# Altium PCB 考勤机指纹密码部分PCB图.PcbDoc
Units mm, origin at the board's own origin, x right, y up, seen from the top; angles counter-clockwise.
Board outline 87.68 x 99.29 mm, 2 copper layers (Top Layer, Bottom Layer); 45 components, 50 nets, 203 pads, 2 vias.
Unrouted connection lines stored in the file: 12.
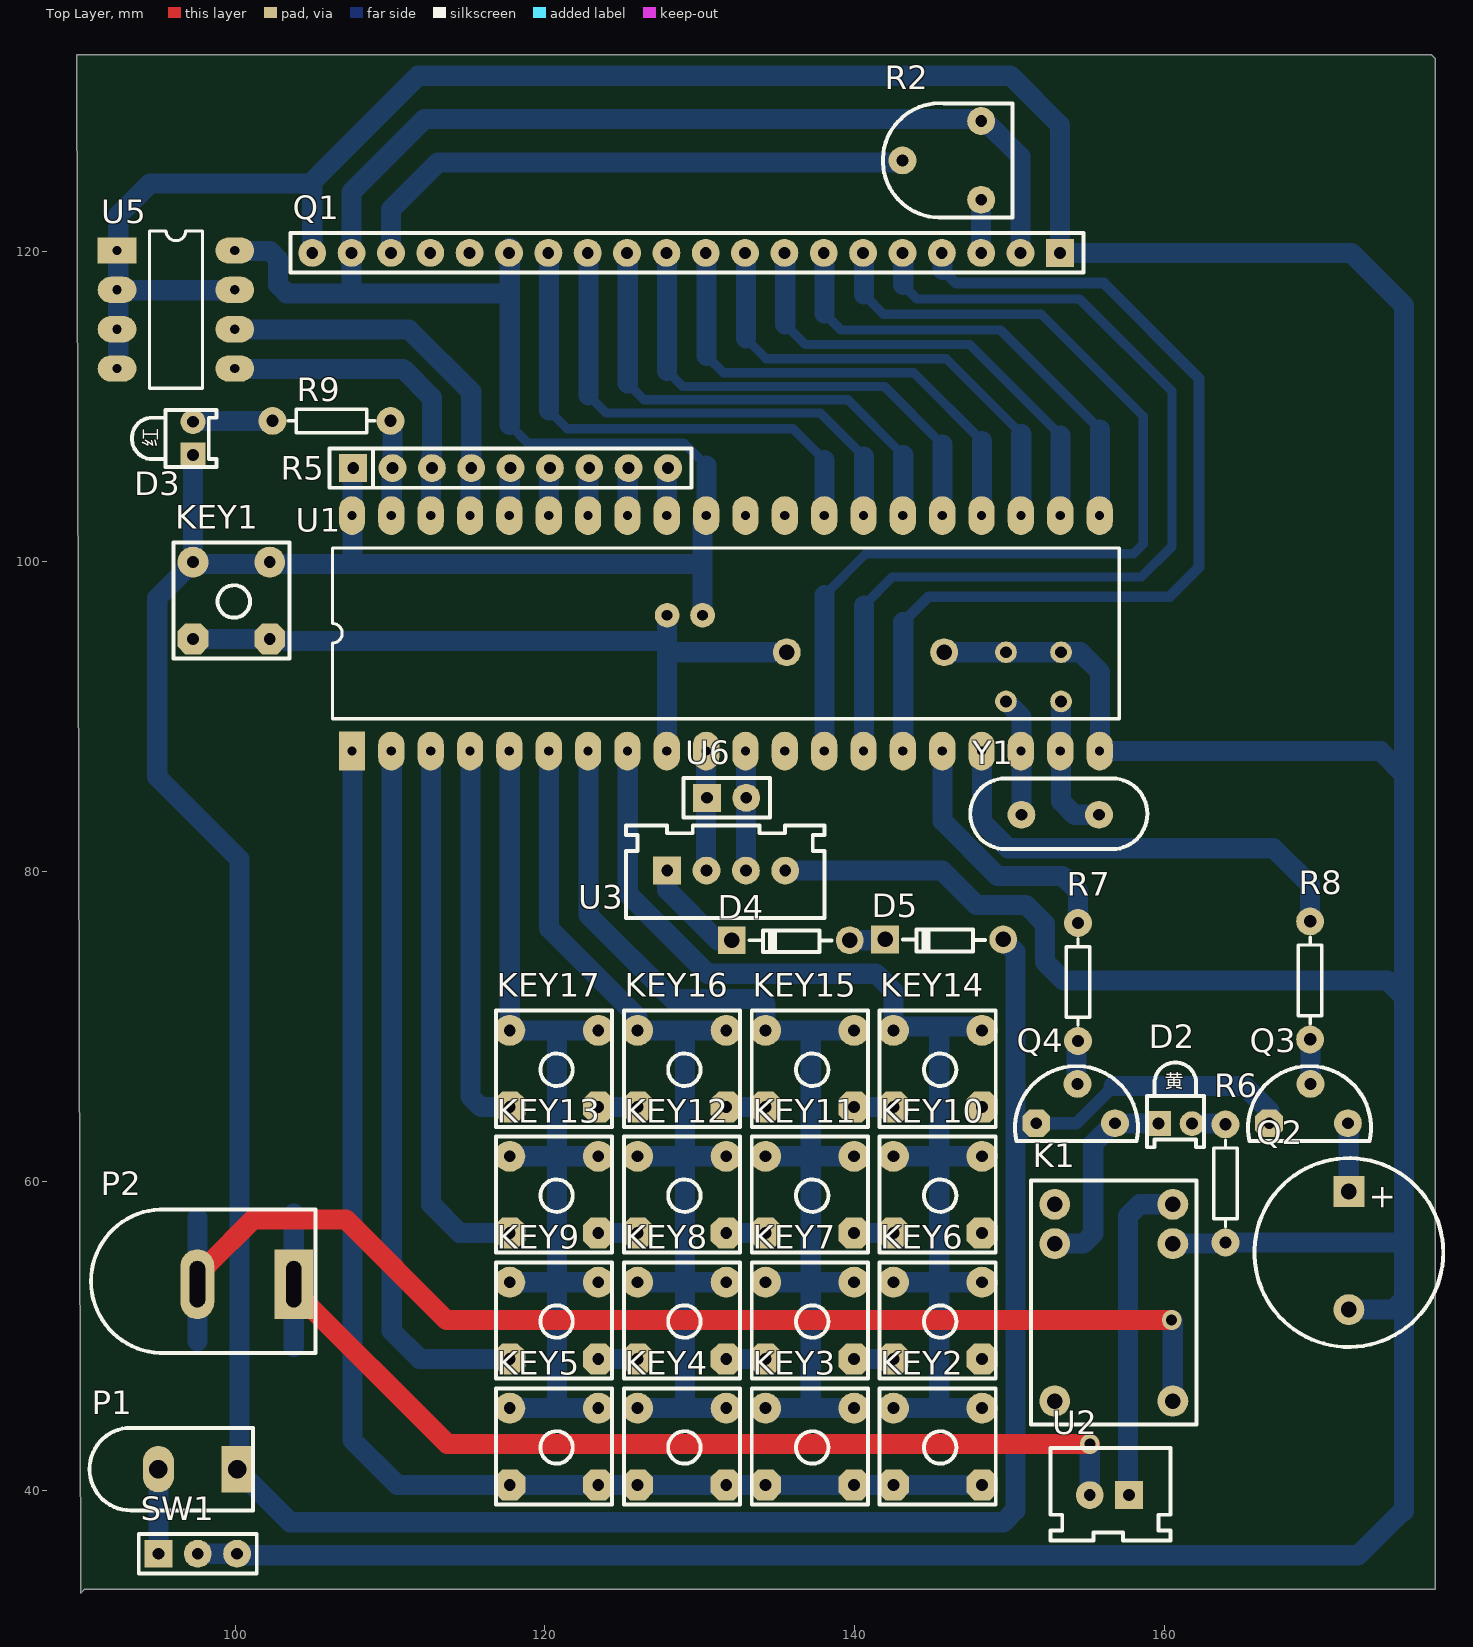
[diagram p0: Top Layer view]
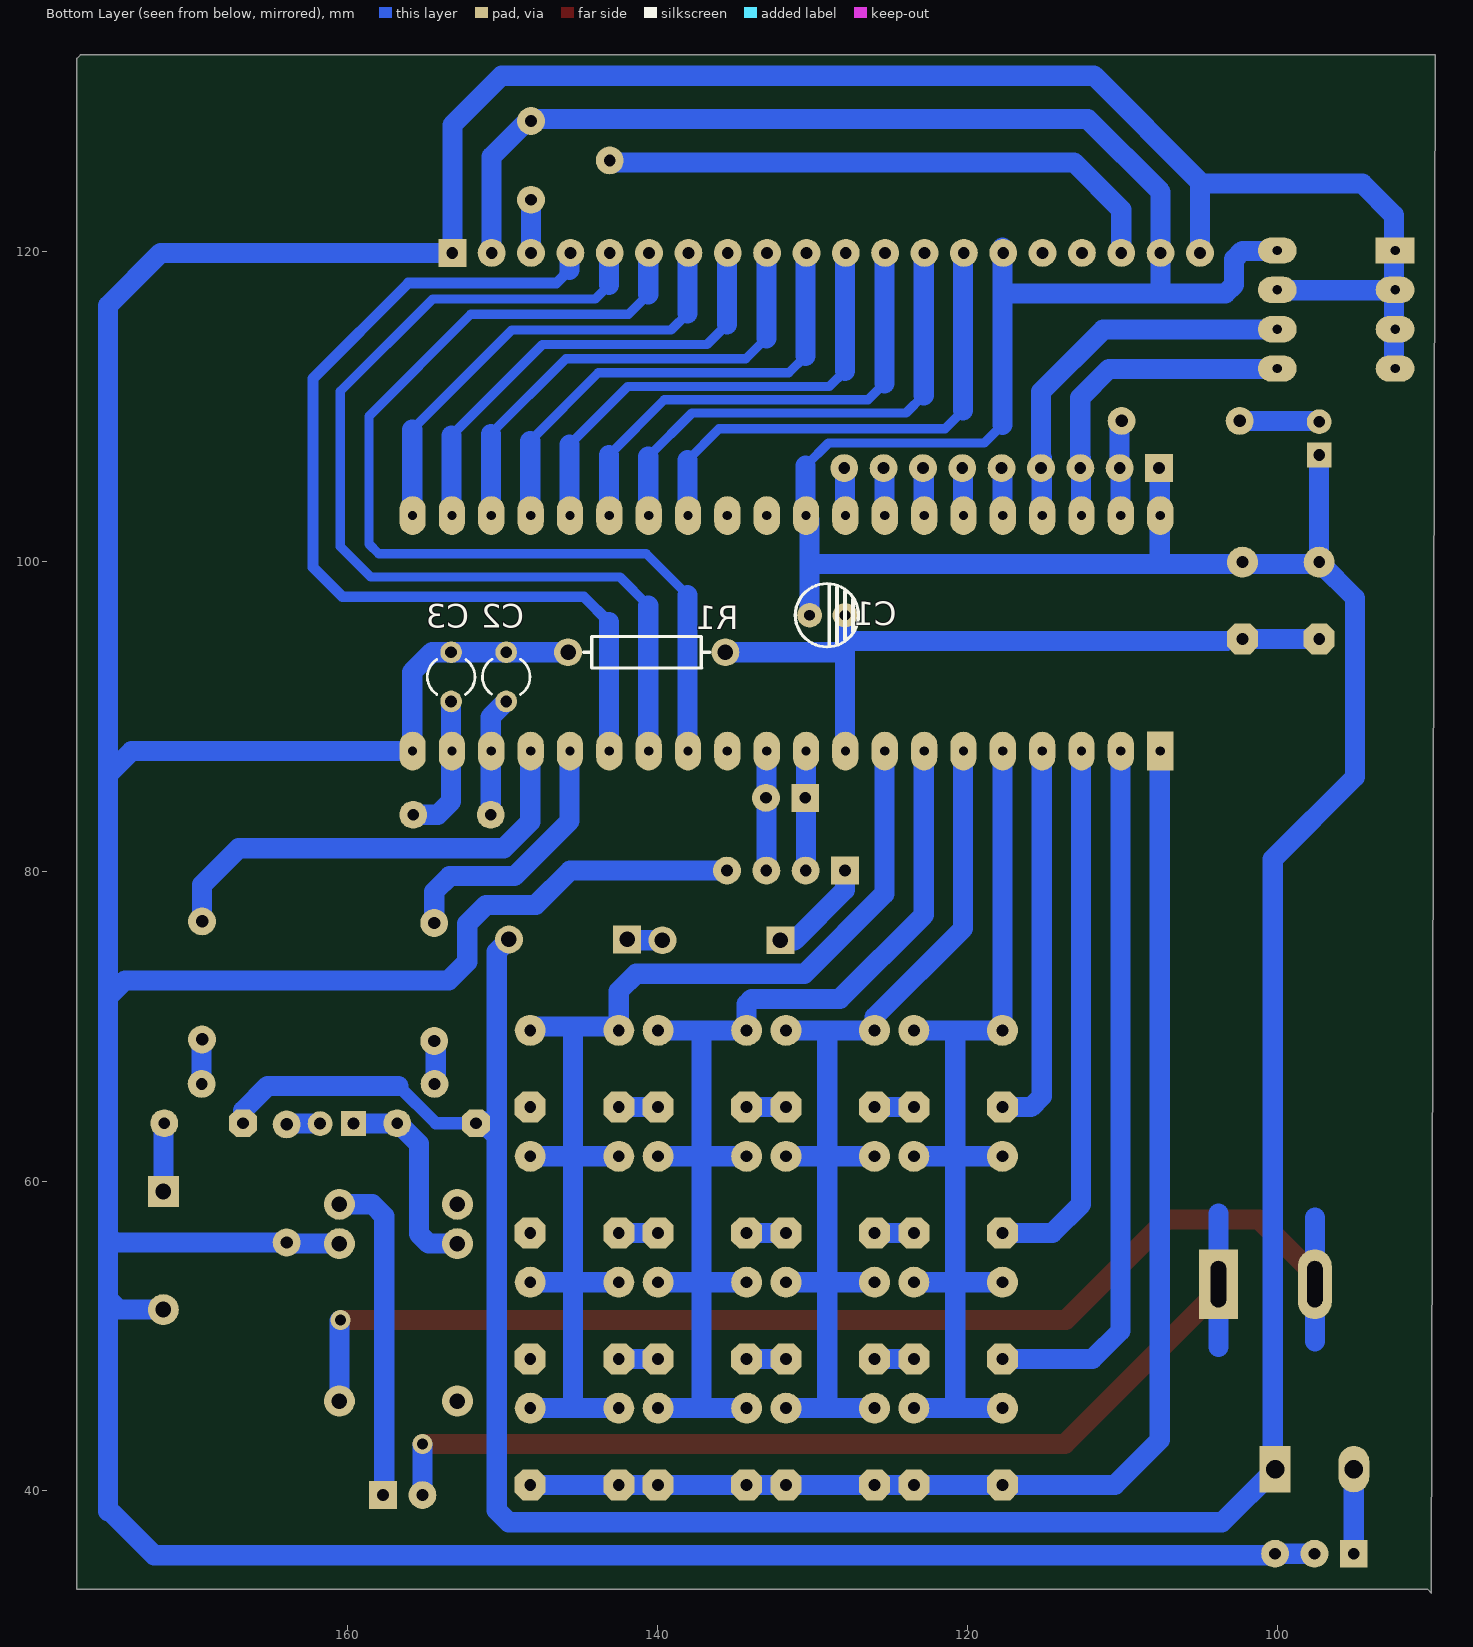
[diagram p1: Bottom Layer view, seen from below]

## Layer stack, top to bottom
Top Solder: solder mask 0.0102, Solder Resist, Dk 3.5
Top Layer: signal copper 0.0356
Dielectric1: dielectric 0.32, FR-4, Dk 4.8
Bottom Layer: signal copper 0.0356
Bottom Solder: solder mask 0.0102, Solder Resist, Dk 3.5

## Board outline
90.043,33.401 90.297,33.655 177.47,33.655 177.47,132.461 177.241,132.69 89.789,132.69

## Design rules (kind name [scope] priority, off if disabled: settings)
Clearance [All] p1: gap=0.254 ignorepadtopadclearanceinfootprint=FALSE except(0: Arc-Hole Track-Hole SMDPad-Hole THPad-Hole Via-Hole Fill-Hole Poly-Hole Region-Hole Text-Hole)
PolygonConnect [All] p1: connectstyle=Relief reliefconductorwidth=0.254 reliefentries=4 polygonreliefangle="90 Angle" airgapwidth=0.254
RoutingVias [All] p1: holewidth=0.711 width=1.27 viastyle="Through Hole" minholewidth=0.711 minwidth=1.27 maxholewidth=0.711 maxwidth=1.27
SilkToSolderMaskClearance SilkscreenOverComponentPads [IsPad] p1: minsilkscreentomaskgap=0.254 clearancetoexposedcopper=TRUE
SolderMaskExpansion [All] p1: expansion=0.102
Width [All] p1: maxlimit=1.3 minlimit=0.254 preferedwidth=0.762 minimp=50.000000 maximp=50.000000 favimp=50.000000
29 further rules are at their usual default settings.

## Components (designator, comment, footprint, x,y, rotation, side; value= is the part's Value field where it differs from the comment)
C1 "10UF" CD4 126.873,98.679 r0 bottom
C2 "30PF" R38 148.107,95.021 r0 bottom
C3 "30PF" R38 154.965,90.068 r180 bottom
D2 "LED-YELLOW" LED-YELLOW 158.725,62.052 r0 top
D3 "LED-RED" LED-RED 98.933,105.969 r90 top
D4 "1N4007" DO-41 140.614,77.089 r180 top
D5 "1N4007" DO-41 150.52,77.14 r180 top
K1 "继电器HK4100F" HK4100F 162.052,44.272 r90 top
KEY1 "复位按键" SW#1 103.632,101.346 r180 top
KEY2 "复位按键" SW#2 149.225,46.736 r180 top
KEY3 "复位按键" SW#2 140.97,46.736 r180 top
KEY4 "复位按键" SW#2 132.715,46.736 r180 top
KEY5 "复位按键" SW#2 124.46,46.736 r180 top
KEY6 "复位按键" SW#2 149.225,54.864 r180 top
KEY7 "复位按键" SW#2 140.97,54.864 r180 top
KEY8 "复位按键" SW#2 132.715,54.864 r180 top
KEY9 "复位按键" SW#2 124.46,54.864 r180 top
KEY10 "复位按键" SW#2 149.225,62.992 r180 top
KEY11 "复位按键" SW#2 140.97,62.992 r180 top
KEY12 "复位按键" SW#2 132.715,62.992 r180 top
KEY13 "复位按键" SW#2 124.46,62.992 r180 top
KEY14 "复位按键" SW#2 149.225,71.12 r180 top
KEY15 "复位按键" SW#2 140.97,71.12 r180 top
KEY16 "复位按键" SW#2 132.715,71.12 r180 top
KEY17 "复位按键" SW#2 124.46,71.12 r180 top
P1 "DC-002" DC-002 91.872,35.306 r0 top
P2 "DC-002" DC-005 90.576,48.768 r0 top
Q1 "LCD12864" HDR20 154.889,121.31 r180 top
Q2 "蜂鸣器" 蜂鸣器 171.882,59.309 r270 top
Q3 "S8550" 三极管 165.227,62.459 r0 top
Q4 "S8550" 三极管 150.19,62.459 r0 top
R1 "10K" AXIAL-0.4 146.66,92.989 r180 bottom
R2 "10K" Res-JT 141.681,122.072 r0 top
R5 "10k" R*9 105.969,104.623 r0 top
R6 "1K" AXIAL-0.3 164.948,55.016 r90 top
R7 "1K" AXIAL-0.3 155.423,68.021 r90 top
R8 "1K" AXIAL-0.3 170.409,68.123 r90 top
R9 "1K" AXIAL-0.3 101.397,108.052 r0 top
SW1 "双掷开关" SS12D07G5 93.65,34.544 r0 top
U1 "STC89C52" DIP40 107.544,87.757 r90 top
U2 "接线柱" XH2P 160.503,42.901 r180 top
U3 "AS608" XH4P 125.095,76.86 r0 top
U5 "AT24C02" DIP8 91.11,111.049 r0 top
U6 "下载口" HDR2 128.803,83.337 r0 top
Y1 "11.0592MHZ" XTAL 155.753,83.642 r180 top

## Footprints (in the part's own frame and the unit in brackets; to place one, negate y for a bottom-side part, rotate by r counter-clockwise, add the part's x,y. Pads: shape width x height; smd on the part's side, far side on the other; paste and mask are expansions set on the pad)
AXIAL-0.3 [mm]
  round 1.8 hole 0.8: 1(1.016,1.016) 2(8.636,1.016)
  silkscreen extent 2.03,0.25 7.62,1.78
AXIAL-0.4 [mm]
  round 1.8 hole 1: 1(0.889,1.143) 2(11.049,1.143)
  silkscreen extent 1.91,0.13 10.03,2.16
CD4 [mm]
  round 1.6 hole 0.7: 1(3.302,2.159) 2(1.016,2.159)
  silkscreen extent 0.15,0.12 4.23,4.2
DC-002 [mm]
  rect 2x3 hole 1.2: 1(8.255,6.096)
  oval 2x3 hole 1.2: 2(3.175,6.096)
  silkscreen extent -1.27,3.43 9.27,8.76
DC-005 [mm]
  rect 2.5x4.5 hole 1 slot 3 at 90 deg: 1(13.208,4.572)
  oval 2.2x4.5 hole 1 slot 3 at 90 deg: 2(6.985,4.572)
  silkscreen extent 0.12,0.13 14.6,9.4
DIP8 [mm]
  rect 2.5x1.7 hole 0.6: 1(1.27,9.017)
  oval 2.5x1.7 hole 0.6: 2(1.27,6.477) 3(1.27,3.937) 4(1.27,1.397) 5(8.87,1.397) 6(8.87,3.937) 7(8.87,6.477) 8(8.87,9.017)
  silkscreen extent 3.35,0.13 6.79,10.29
DIP40 [mm]
  rect 2.5x1.7 hole 0.6: 1(0,0)
  oval 2.5x1.7 hole 0.6: 2(0,-2.54) 3(0,-5.08) 4(0,-7.62) 5(0,-10.16) 6(0,-12.7) 7(0,-15.24) 8(0,-17.78) 9(0,-20.32) 10(0,-22.86) 11(0,-25.4) 12(0,-27.94) 13(0,-30.48) 14(0,-33.02) 15(0,-35.56) 16(0,-38.1) 17(0,-40.64) 18(0,-43.18) 19(0,-45.72) 20(0,-48.26) 21(15.2,-48.26) 22(15.2,-45.72) 23(15.2,-43.18) 24(15.2,-40.64) 25(15.2,-38.1) 26(15.2,-35.56) 27(15.2,-33.02) 28(15.2,-30.48) 29(15.2,-27.94) 30(15.2,-25.4) 31(15.2,-22.86) 32(15.2,-20.32) 33(15.2,-17.78) 34(15.2,-15.24) 35(15.2,-12.7) 36(15.2,-10.16) 37(15.2,-7.62) 38(15.2,-5.08) 39(15.2,-2.54) 40(15.2,0)
  silkscreen extent 2.08,-49.53 13.12,1.27
DO-41 [mm]
  round 1.8 hole 1: 1(0.94,1.549)
  rect 1.8x1.8 hole 1: 2(8.56,1.549)
  silkscreen extent 2.11,0.81 7.42,2.39
HDR2 [mil]
  rect 70.87x70.87 hole 30: 1(65,55)
  round 70.87 hole 30: 2(165,55)
  silkscreen extent 5,5 225,105
HDR20 [mil]
  rect 70.87x70.87 hole 30: 1(65,55)
  round 70.87 hole 30: 2(165,55) 3(265,55) 4(365,55) 5(465,55) 6(565,55) 7(665,55) 8(765,55) 9(865,55) 10(965,55) 11(1065,55) 12(1165,55) 13(1265,55) 14(1365,55) 15(1465,55) 16(1565,55) 17(1665,55) 18(1765,55) 19(1865,55) 20(1965,55)
  silkscreen extent 5,5 2020,105
HK4100F [mm]
  round 2 hole 1: 1(1.524,9.144) 2(11.684,9.144) 3(14.224,9.144) 4(14.224,1.524) 5(11.684,1.524) 6(1.524,1.524)
  silkscreen extent 0,0 15.75,10.67
LED-RED [mil]
  rect 62.99x62.99 hole 30: 1(35,65)
  round 62.99 hole 30: 2(120,65)
  silkscreen extent 5,5 150,220
LED-YELLOW [mil]
  rect 62.99x62.99 hole 30: 1(35,65)
  round 62.99 hole 30: 2(120,65)
  silkscreen extent 5,5 150,220
R38 [mil]
  round 55.12 hole 30: 1(65,160) 2(65,35)
  silkscreen extent 4,53 126,142
R*9 [mil]
  rect 70.87x70.87 hole 30: 1(65,55)
  round 70.87 hole 30: 2(165,55) 3(265,55) 4(365,55) 5(465,55) 6(565,55) 7(665,55) 8(765,55) 9(865,55)
  silkscreen extent 5,5 925,105
Res-JT [mm]
  round 1.8 hole 0.762: 1(6.477,6.35) 2(6.477,1.27) 3(1.397,3.81)
  silkscreen extent 0.13,0.12 8.51,7.5
SS12D07G5 [mil]
  rect 70.87x70.87 hole 30: 1(55,55)
  round 70.87 hole 30: 2(155,55) 2(255,55)
  silkscreen extent 5,5 305,105
SW#1 [mm]
  oct 2x2 hole 0.762: 1(1.397,6.35) 1(6.35,6.35)
  round 2 hole 0.762: 2(1.397,1.397) 2(6.35,1.397)
  silkscreen extent 0.13,0.13 7.62,7.62
SW#2 [mm]
  oct 2x2 hole 0.762: 1(1.016,6.35) 1(6.731,6.35)
  round 2 hole 0.762: 2(1.016,1.397) 2(6.731,1.397)
  silkscreen extent 0.13,0.13 7.62,7.62
XH2P [mm]
  rect 1.8x1.8 hole 0.762: 1(2.794,3.175)
  round 1.8 hole 0.762: 2(5.334,3.175)
  silkscreen extent 0.13,0.13 7.87,6.1
XH4P [mm]
  rect 1.8x1.8 hole 0.762: 1(2.794,3.175)
  round 1.8 hole 0.762: 2(5.334,3.175) 3(7.874,3.175) 4(10.414,3.175)
  silkscreen extent 0.13,0.13 12.95,6.1
XTAL [mm]
  round 1.8 hole 0.76: 1(-0.008,-0.001) 2(4.996,-0.001)
  silkscreen extent -3.13,-2.35 8.3,2.22
三极管 [mm]
  oct 1.8x1.8 hole 0.762: 1(1.524,1.27)
  round 1.8 hole 0.762: 2(4.191,3.81) 3(6.604,1.27)
  silkscreen extent 0.16,0.13 8.09,4.95
蜂鸣器 [mm]
  rect 2x2 hole 1.016: 1(-0.009,0.009)
  round 2 hole 1.016: 2(7.611,0.009)
  silkscreen extent -2.17,-6.08 10.02,6.1

## Via types
v1: diameter 1.27, hole 0.711, Top Layer to Bottom Layer, 2 vias

## Nets (pads, with @x,y where several pads share a name; then routed paths per layer and width w, separated by ;. In a path a pad name is that pad's centre, name@x,y a point inside that pad or via, vN(x,y) a via of type N, cw(c..) or ccw(c..) an arc to the next point about the centre after c; other vN are vias at no path point)
+12V: P2.1 U2.2 | length 67.4
  Top Layer w1.3: P2.1@103.772,52.946 113.69,43.028 v1(155.169,43.028)
  Bottom Layer w1.3: 103.784,49.276 P2.1 103.784,57.912 ; U2.2 v1@155.169,42.977
E: Q1.6 U1.13 | length 64.2
  Bottom Layer w0.6: 138.049,97.815 140.716,100.482 157.988,100.482 158.623,101.117 158.623,109.372 152.044,115.951 141.859,115.951 140.589,117.221
  Bottom Layer w1.3: U1.13@138.049,87.757 138.049,97.815 ; 140.589,117.221 Q1.6@140.589,119.913
GND: C2.2 C3.1 K1.5 Q1.1 Q1.20 Q2.2 R1.1 R6.1 SW1.2 U1.20 U3.4 U5.1 U5.2 U5.3 U5.4 U5.7 | length 376.2
  Bottom Layer w1.3: U5.4@92.456,112.42 U5.2@92.456,117.5 ; SW1.2@97.485,36.043 97.587,35.941 SW1.2@100.127,35.941 ; U5.7@100.056,117.5 U5.2@92.456,117.5 ; SW1.2@100.076,35.839 172.491,35.839 175.235,38.583 ; Q1.20 104.978,124.511 111.811,131.343 150.063,131.343 153.238,128.168 Q1.1 172.06,119.913 175.463,116.51 175.463,86.233 ; 104.978,124.384 94.488,124.384 92.456,122.352 U5.2@92.456,117.5 ; U3.4 145.644,80.035 147.853,77.826 151.054,77.826 152.273,76.606 152.273,74.143 153.467,72.949 174.371,72.949 175.463,71.857 ; R1.1 C2.2 C3.1 154.559,94.132 155.829,92.862 155.829,87.757 173.939,87.757 175.463,86.233 ; K1.5 R6.1@163.855,55.956 ; R6.1 175.031,56.032 175.463,56.464 ; Q2.2 174.761,51.698 175.463,52.4 ; 175.463,38.684 175.463,52.4 ; 175.463,52.4 175.463,56.464 ; 175.463,56.464 175.463,71.857 ; 175.463,71.857 175.463,86.233
NetC1_2: C1.2 KEY1.1 R1.2 U1.9 | length 46
  Bottom Layer w1.3: KEY1.1@97.282,94.996 KEY1.1@102.235,94.996 ; 103.251,94.869 127.762,94.869 127.889,94.742 ; U1.9@127.889,87.757 127.889,94.742 ; C1.2 127.889,94.742 ; 128.041,94.132 R1.2
NetC2_1: C2.1 U1.18 Y1.2 | length 7.7
  Bottom Layer w1.3: C2.1 150.757,89.959 Y1.2
NetC3_2: C3.2 U1.19 Y1.1 | length 9.3
  Bottom Layer w1.3: C3.2 153.314,84.506 154.177,83.643 Y1.1
NetD2_1: D2.1 K1.2 Q4.3 | length 13.3
  Bottom Layer w1.3: K1.2 154.762,55.956 155.397,56.591 155.397,62.408 156.693,63.703 D2.1
NetD2_2: D2.2 R6.2 | length 2.1
  Bottom Layer w1.3: D2.2 R6.2@163.881,63.703
NetD3_2: D3.2 R9.1 | length 5.1
  Bottom Layer w1.3: D3.2@97.333,109.068 R9.1
NetD4_1: D4.1 D5.2 | length 2.2
  Bottom Layer w1.3: D4.1 D5.2@141.91,75.54
NetD4_2: D4.2 U3.1 | length 6.8
  Bottom Layer w1.3: U3.1 127.889,78.791 131.14,75.54 D4.2
NetK1_4: K1.4 U2.1 | length 21.4
  Bottom Layer w1.3: U2.1@157.632,39.522 157.632,57.734 158.394,58.496 K1.4
NetK1_6: K1.6 P2.2 | length 79.2
  Top Layer w1.3: P2.2@98.247,54.61 101.143,57.506 107.163,57.506 113.64,51.029 v1(160.452,51.029)
  Bottom Layer w1.3: 97.561,49.657 P2.2 97.561,57.633 ; K1.6 v1@160.528,50.978
NetKEY2_1: KEY2.1 KEY3.1 KEY4.1 KEY5.1 U1.1 | length 86.3
  Bottom Layer w1.3: U1.1@107.569,87.757 107.569,43.282 110.465,40.386 117.729,40.386 123.444,40.386 125.984,40.386 131.699,40.386 134.239,40.386 139.954,40.386 142.494,40.386 KEY2.1@148.209,40.386
NetKEY2_2: KEY2.2 KEY6.2 KEY10.2 KEY14.2 U1.8 | length 78.2
  Bottom Layer w1.3: U1.8@125.349,87.757 125.349,78.537 130.505,73.381 141.376,73.381 142.494,72.263 KEY14.2@142.494,69.723 ; KEY2.2@142.494,45.339 KEY2.2@148.209,45.339 ; KEY6.2@142.494,53.467 145.452,53.467 ; KEY10.2@142.494,61.595 145.452,61.595 ; KEY14.2@142.949,69.977 145.452,69.977 ; 145.452,45.429 145.452,53.467 ; KEY14.2@147.955,69.977 145.452,69.977 ; KEY6.2@148.209,53.467 145.452,53.467 ; KEY10.2@148.209,61.595 145.452,61.595 ; 145.452,53.467 145.452,61.595 ; 145.452,61.595 145.452,69.977
NetKEY3_2: KEY3.2 KEY7.2 KEY11.2 KEY15.2 U1.7 | length 73.3
  Bottom Layer w1.3: U1.7@122.809,87.757 122.809,77.165 128.219,71.755 133.909,71.755 134.239,71.425 134.239,69.723 137.16,69.723 ; KEY3.2@134.239,45.339 137.16,45.339 ; KEY7.2@134.239,53.467 137.16,53.467 ; KEY11.2@134.239,61.595 137.16,61.595 ; KEY3.2@139.954,45.339 137.16,45.339 ; KEY7.2@139.954,53.467 137.16,53.467 ; KEY11.2@139.954,61.595 137.16,61.595 ; KEY15.2@139.954,69.723 137.16,69.723 ; 137.16,45.339 137.16,53.467 ; 137.16,53.467 137.16,61.595 ; 137.16,61.595 137.16,69.723
NetKEY4_2: KEY4.2 KEY8.2 KEY12.2 KEY16.2 U1.6 | length 67.6
  Bottom Layer w1.3: U1.6@120.269,87.757 120.269,76.302 125.984,70.587 125.984,69.723 129.032,69.723 ; KEY4.2@125.984,45.339 129.032,45.339 ; KEY8.2@125.984,53.467 129.032,53.467 ; KEY12.2@125.984,61.595 129.032,61.595 ; KEY4.2@131.699,45.339 129.032,45.339 ; KEY8.2@131.699,53.467 129.032,53.467 ; KEY12.2@131.699,61.595 129.032,61.595 ; KEY16.2@131.699,69.723 129.032,69.723 ; 129.032,45.339 129.032,53.467 ; 129.032,53.467 129.032,61.595 ; 129.032,61.595 129.032,69.723
NetKEY5_2: KEY5.2 KEY9.2 KEY13.2 KEY17.2 U1.5 | length 65.4
  Bottom Layer w1.3: KEY5.2@117.729,45.339 123.444,45.339 KEY5.2@123.444,45.186 ; KEY9.2@117.729,53.467 120.777,53.467 ; KEY13.2@117.729,61.595 120.777,61.595 ; KEY17.2@117.729,69.545 U1.5@117.729,87.757 ; KEY17.2@117.729,69.723 120.777,69.723 ; 120.777,45.593 120.777,53.467 ; KEY9.2@123.444,53.467 120.777,53.467 ; KEY13.2@123.444,61.595 120.777,61.595 ; KEY17.2@123.444,69.723 120.777,69.723 ; 120.777,53.467 120.777,61.595 ; 120.777,61.595 120.777,69.723
NetKEY6_1: KEY6.1 KEY7.1 KEY8.1 KEY9.1 U1.2 | length 53.4
  Bottom Layer w1.3: U1.2@110.109,87.757 110.109,50.317 111.912,48.514 KEY9.1@117.729,48.514 ; KEY9.1@123.444,48.514 KEY8.1@125.984,48.514 ; KEY8.1@131.699,48.514 KEY7.1@134.239,48.514 ; KEY7.1@139.954,48.514 KEY6.1@142.494,48.514
NetKEY10_1: KEY10.1 KEY11.1 KEY12.1 KEY13.1 U1.3 | length 42.7
  Bottom Layer w1.3: U1.3@112.649,87.757 112.649,58.496 114.503,56.642 KEY13.1@117.729,56.642 ; KEY13.1@123.444,56.642 KEY12.1@125.984,56.642 ; KEY12.1@131.699,56.642 KEY11.1@134.239,56.642 ; KEY11.1@139.954,56.642 KEY10.1@142.494,56.642
NetKEY14_1: KEY14.1 KEY15.1 KEY16.1 KEY17.1 U1.4 | length 32.7
  Bottom Layer w1.3: U1.4@115.189,87.757 115.189,65.456 115.875,64.77 KEY17.1@117.729,64.77 ; KEY17.1@123.444,64.77 KEY16.1@125.984,64.77 ; KEY16.1@131.699,64.77 KEY15.1@134.239,64.77 ; KEY15.1@139.954,64.77 KEY14.1@142.494,64.77
NetP1_2: P1.2 SW1.1 | length 5.7
  Bottom Layer w1.3: SW1.1 P1.2@95.047,41.656
NetQ1_3: Q1.3 R2.2 | length 3.4
  Bottom Layer w1.3: Q1.3 R2.2
NetQ1_7: Q1.7 U1.21 | length 30.3
  Bottom Layer w0.6: 138.049,116.002 139.116,114.935 149.403,114.935 155.829,108.509
  Bottom Layer w1.3: 138.049,116.002 Q1.7@138.049,119.913 ; U1.21@155.829,102.957 155.829,108.509
NetQ1_8: Q1.8 U1.22 | length 30.5
  Bottom Layer w0.6: 135.509,115.291 136.804,113.995 147.422,113.995 153.289,108.128
  Bottom Layer w1.3: 135.509,115.291 Q1.8@135.509,119.913 ; U1.22@153.289,102.957 153.289,108.128
NetQ1_9: Q1.9 U1.23 | length 31.1
  Bottom Layer w0.6: 132.969,114.402 134.29,113.081 145.898,113.081 150.749,108.229
  Bottom Layer w1.3: 132.969,114.402 Q1.9@132.969,119.913 ; U1.23@150.749,102.957 150.749,108.229
NetQ1_10: Q1.10 U1.24 | length 31.5
  Bottom Layer w0.6: 130.429,113.259 131.521,112.166 143.815,112.166 148.209,107.772
  Bottom Layer w1.3: 130.429,113.259 Q1.10@130.429,119.913 ; U1.24@148.209,102.957 148.209,107.772
NetQ1_11: Q1.11 U1.25 | length 31.9
  Bottom Layer w0.6: 127.889,112.293 128.899,111.284 141.914,111.284 145.669,107.529
  Bottom Layer w1.3: 127.889,112.293 Q1.11@127.889,119.913 ; U1.25@145.669,102.957 145.669,107.529
NetQ1_12: Q1.12 U1.26 | length 32
  Bottom Layer w0.6: 125.349,111.481 126.4,110.43 139.557,110.43 143.129,106.858
  Bottom Layer w1.3: 125.349,111.481 Q1.12@125.349,119.913 ; U1.26@143.129,102.957 143.129,106.858
NetQ1_13: Q1.13 U1.27 | length 32.4
  Bottom Layer w0.6: 122.809,110.719 123.952,109.576 137.77,109.576 140.589,106.756
  Bottom Layer w1.3: 122.809,110.719 Q1.13@122.809,119.913 ; U1.27@140.589,102.957 140.589,106.756
NetQ1_14: Q1.14 U1.28 | length 32.9
  Bottom Layer w0.6: 120.269,109.728 121.437,108.56 136.017,108.56 138.049,106.528
  Bottom Layer w1.3: 120.269,109.728 Q1.14@120.269,119.913 ; U1.28@138.049,102.957 138.049,106.528
NetQ1_18: Q1.18 R2.3 | length 37.1
  Bottom Layer w1.3: Q1.18 110.058,122.707 113.106,125.755 R2.3@143.078,125.755
NetQ2_1: Q2.1 Q3.3 | length 4.4
  Bottom Layer w1.3: Q2.1 Q3.3@171.891,63.669
NetQ3_2: Q3.2 R8.1 | length 2.8
  Bottom Layer w1.3: Q3.2 R8.1@169.418,69.113
NetQ4_2: Q4.2 R7.1 | length 2.7
  Bottom Layer w1.3: Q4.2@154.305,66.269 R7.1@154.305,68.936
NetR5_2: R5.2 R9.2 U1.39 | length 5.7
  Bottom Layer w1.3: U1.39@110.109,102.957 R5.2@110.109,105.689 ; R5.2 R9.2@110.16,108.941
NetR5_3: R5.3 U1.38 U5.5 | length 21.9
  Bottom Layer w1.3: U5.5@99.847,112.42 110.846,112.42 112.7,110.566 R5.3 ; U1.38@112.649,102.957 R5.3@112.649,106.68
NetR5_4: R5.4 U1.37 U5.6 | length 25.5
  Bottom Layer w1.3: U5.6@100.056,114.96 111.227,114.96 115.24,110.947 R5.4 ; U1.37@115.189,102.957 R5.4@115.189,106.68
NetR5_5: R5.5 U1.36 | length 3.1
  Bottom Layer w1.3: U1.36@117.729,102.957 R5.5@117.729,106.02
NetR5_6: R5.6 U1.35 | length 3.1
  Bottom Layer w1.3: U1.35@120.269,102.957 R5.6@120.269,106.02
NetR5_7: R5.7 U1.34 | length 3.1
  Bottom Layer w1.3: U1.34@122.809,102.957 R5.7@122.809,106.02
NetR5_8: R5.8 U1.33 | length 2.7
  Bottom Layer w1.3: U1.33@125.349,102.957 R5.8@125.349,105.613
NetR5_9: R5.9 U1.32 | length 3.1
  Bottom Layer w1.3: U1.32@127.889,102.957 R5.9@127.889,106.02
NetR7_2: R7.2 U1.16 | length 17.2
  Bottom Layer w1.3: U1.16@145.669,87.757 145.669,83.236 149.225,79.68 153.416,79.68 154.407,78.689 R7.2
NetR8_2: R8.2 U1.17 | length 29.8
  Bottom Layer w1.3: U1.17@148.209,87.757 148.209,83.185 149.911,81.483 167.03,81.483 169.393,79.121 R8.2
NetU1_10: U1.10 U3.2 U6.1 | length 7.7
  Bottom Layer w1.3: U1.10 130.404,80.061 U3.2
NetU1_11: U1.11 U3.3 U6.2 | length 7.7
  Bottom Layer w1.3: U3.3 U1.11@132.969,87.732
R/W: Q1.5 U1.14 | length 63.1
  Bottom Layer w0.6: 140.589,97.155 142.418,98.984 158.496,98.984 160.477,100.965 160.477,110.973 154.508,116.942 144.018,116.942 143.129,117.831
  Bottom Layer w1.3: U1.14@140.589,87.757 140.589,97.155 ; 143.129,117.831 Q1.5@143.129,119.913
RS: Q1.4 U1.15 | length 61.6
  Bottom Layer w0.7: 143.129,96.088 144.755,97.714 160.325,97.714 162.23,99.619 162.23,111.811 156.083,117.958 146.533,117.958 145.669,118.821
  Bottom Layer w1.3: U1.15@143.129,87.757 143.129,96.088 ; 145.669,118.821 Q1.4@145.669,119.913
VCC: C1.1 D3.1 D5.1 KEY1.2 P1.1 Q1.2 Q1.15 Q1.19 Q3.1 Q4.1 R2.1 R5.1 U1.31 U1.40 U5.8 | length 329.2
  Bottom Layer w0.6: 117.729,108.814 118.897,107.645 128.956,107.645 130.429,106.172
  Bottom Layer w0.8: Q4.1@151.638,63.729 Q4.1 154.305,63.729 156.718,66.142
  Bottom Layer w1.3: D3.1 97.282,99.949 94.971,97.638 94.971,86.081 100.279,80.772 P1.1@100.279,41.402 ; KEY1.2@97.409,99.822 107.442,99.822 ; U5.8@100.056,120.04 102.235,120.04 102.768,119.507 102.768,117.856 103.327,117.297 117.678,117.297 117.729,117.246 ; P1.1@100.279,41.554 P1.1 103.556,37.973 149.606,37.973 150.368,38.735 150.368,62.89 ; 107.518,117.551 Q1.19 107.518,123.85 112.217,128.549 148.285,128.549 150.698,126.136 Q1.2 ; R5.1@107.569,106.02 107.569,99.949 107.442,99.822 ; 117.729,108.814 117.729,117.246 ; Q1.15@117.729,120.269 117.729,117.246 ; C1.1 130.175,99.822 ; U1.31@130.175,102.703 130.175,99.822 ; U1.31@130.429,102.957 130.429,106.172 ; D5.1 150.368,74.803 150.368,62.89 ; Q4.1@151.409,63.932 150.368,62.89 ; 156.718,66.142 165.151,66.142 166.751,64.541 Q3.1 ; 107.442,99.822 130.175,99.822
pads on no net: K1.1 K1.3 Q1.16 Q1.17 U1.12 U1.29 U1.30

## Silkscreen, mask and mechanical layers (free items; w line width, h text height)
Mechanical 1:
  lines w0.762: 90.17,33.655 177.521,33.655 177.521,132.918 90.17,132.918 90.17,33.655

## Text inside footprints (layer, text, board x,y; h text height)
D2: Top Overlay "黄" at 159.995,65.735 h1.52
D3: Top Overlay "红" at 95.25,107.366 h1.52 r90
Q2: Top Overlay "+" at 173.415,59.826 h1.52 r270